# EAGLE board VCO3340 v2 designblock (EAGLE 9.4.2)
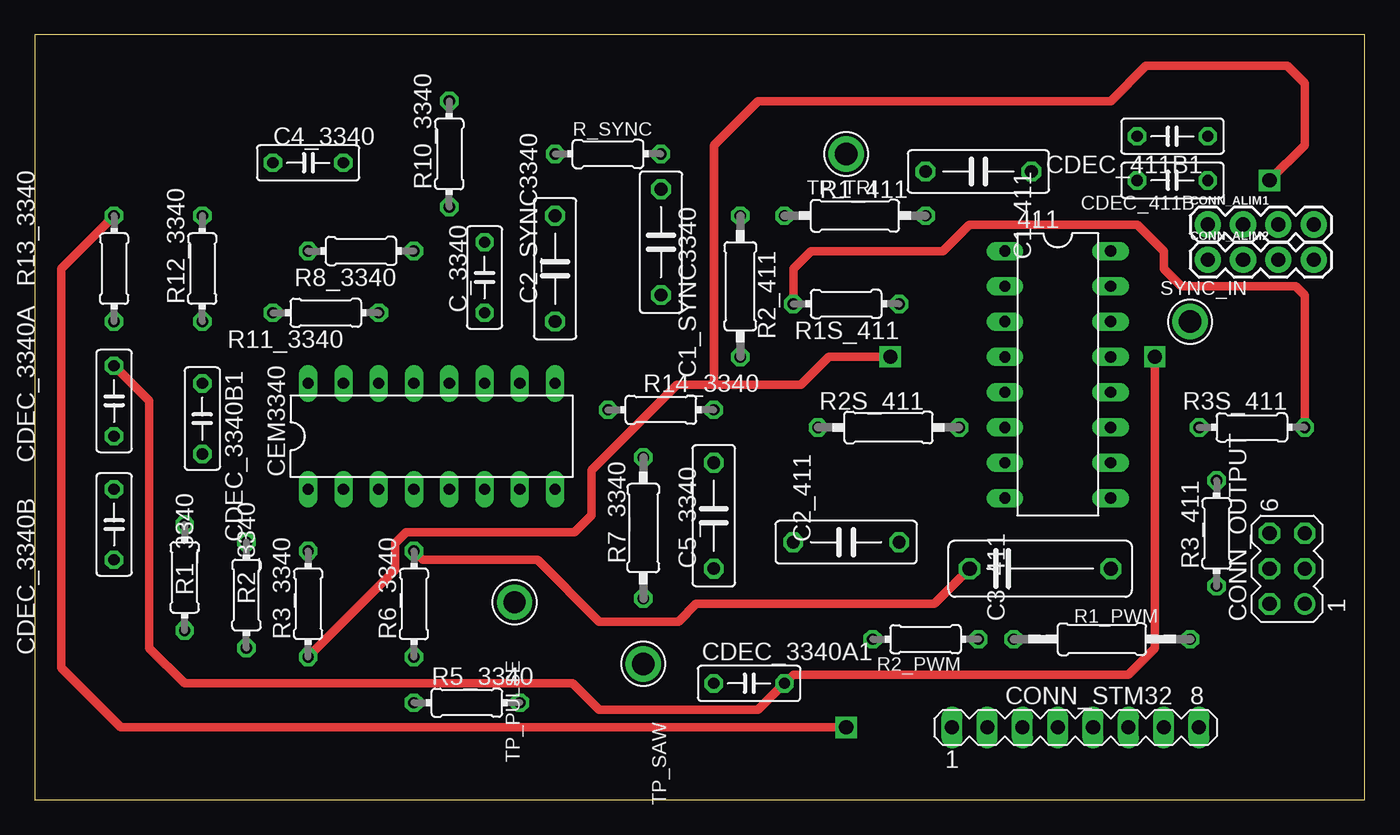
[diagram p0: board, top side]
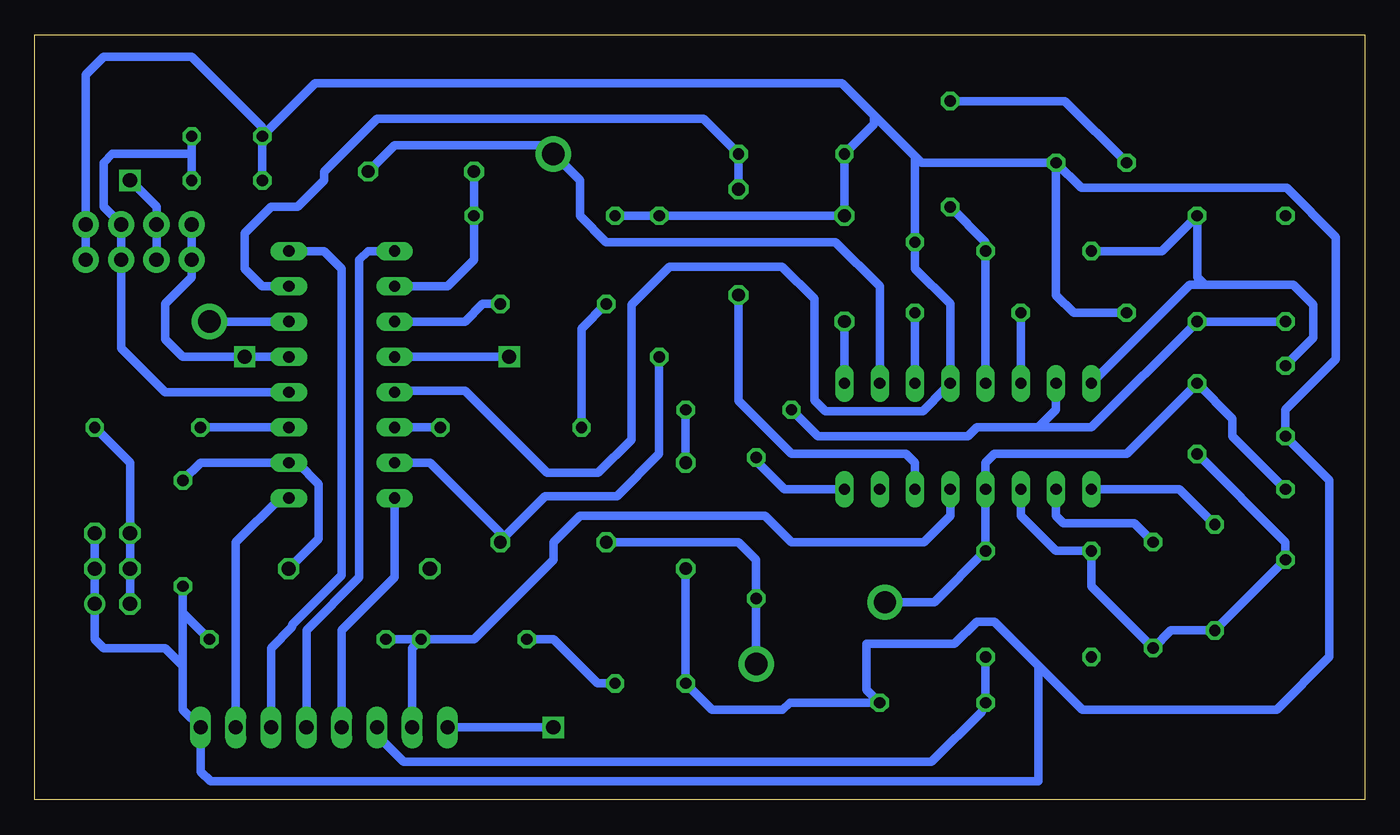
[diagram p1: board, bottom side, seen from below]

Size 95.76 x 55.06 mm. Coordinates in mm from the lower left corner, seen from the top.
Outline: 0,0 95.76,0 95.76,55.06 0,55.06 0,0
Copper layers (1*16): Top 0.035mm / dielectric 1.5mm / Bottom 0.035mm
Design rules "default *": minimum track width 0.4mm, minimum drill 0.35mm, track to track 0.4mm, track to pad 0.4mm, pad to pad 0.4mm, via to via 0.4mm, smd to smd 0.4mm, copper to edge 40mil, drill to drill 6mil, minimum pad ring 10mil, minimum via ring 8mil, stop-mask expansion 4mil, vias tented up to drill 0mil, thermal gap 10mil

## Footprints (pad centres in the part's own frame; a part is rotated, then mirrored left to right if it is on the bottom)
DIL16 = drill 0.813 long: 1 -8.89,-3.81; 2 -6.35,-3.81; 3 -3.81,-3.81; 4 -1.27,-3.81; 5 1.27,-3.81; 6 3.81,-3.81; 7 6.35,-3.81; 8 8.89,-3.81; 9 8.89,3.81; 10 6.35,3.81; 11 3.81,3.81; 12 1.27,3.81; 13 -1.27,3.81; 14 -3.81,3.81; 15 -6.35,3.81; 16 -8.89,3.81
C075-032X103 = drill 0.914 octagon: 1 -3.81,0; 2 3.81,0
C102-043X133 = drill 1.016 octagon: 1 -5.08,0; 2 5.08,0
C050-025X075 = drill 0.813 octagon: 1 -2.54,0; 2 2.54,0
1X04 = drill 1.016 pad 1.88: 1 0,0; 2 2.54,0; 3 5.08,0; 4 7.62,0
MA03-2 = drill 1.016: 1 -2.54,-1.27 | drill 1.016 octagon: 2 -2.54,1.27; 3 0,-1.27; 4 0,1.27; 5 2.54,-1.27; 6 2.54,1.27
MA08-1 = drill 1.016 long: 1 -8.89,0; 2 -6.35,0; 3 -3.81,0; 4 -1.27,0; 5 1.27,0; 6 3.81,0; 7 6.35,0; 8 8.89,0
0207/10 = drill 0.813 octagon: 1 -5.08,0; 2 5.08,0
0204/7 = drill 0.813 octagon: 1 -3.81,0; 2 3.81,0
0207/12 = drill 0.813 octagon: 1 -6.35,0; 2 6.35,0
TESTPOINT_63 = drill 1.6 pad 2.54: P$1 0,0

## Placement (x,y rotation side)
411  ADG411N  [DIL16]  73.66,30.61 270 top
C1_411  470n  [C075-032X103]  67.95,45.21 180 top
C1_SYNC3340  1n  [C075-032X103]  45.09,40.13 270 top
C2_411  470n  [C075-032X103]  58.42,18.54 0 top
C2_SYNC3340  100n  [C075-032X103]  37.46,38.23 270 top
C3_411  470n  [C102-043X133]  72.39,16.64 0 top
C4_3340  10n  [C050-025X075]  19.69,45.85 0 top
C5_3340  10n  [C075-032X103]  48.89,20.45 90 top
C_3340  6.8n  [C050-025X075]  32.38,37.59 270 top
CDEC_411B  100n  [C050-025X075]  81.92,44.58 180 top
CDEC_411B1  10u  [C050-025X075]  81.92,47.75 180 top
CDEC_3340A  100n  [C050-025X075]  5.71,28.7 90 top
CDEC_3340A1  10u  [C050-025X075]  51.43,8.38 0 top
CDEC_3340B  100n  [C050-025X075]  5.71,19.81 270 top
CDEC_3340B1  10u  [C050-025X075]  12.06,27.43 270 top
CEM3340  CEM3340  [DIL16]  28.58,26.16 0 top
CONN_ALIM1  [1X04]  84.45,41.4 0 top
CONN_ALIM2  [1X04]  84.45,38.86 0 top
CONN_OUTPUT  [MA03-2]  90.17,16.64 90 top
CONN_STM32  [MA08-1]  74.93,5.21 0 top
R1_411  100k  [0207/10]  59.05,42.04 0 top
R1_3340  30k  [0204/7]  10.79,16 270 top
R1_PWM  68k  [0207/12]  76.84,11.56 0 top
R1S_411  1k  [0204/7]  58.42,35.69 180 top
R2_411  100k  [0207/10]  50.8,36.96 270 top
R2_3340  5.6k  [0204/7]  15.24,14.73 270 top
R2_PWM  330k  [0204/7]  64.14,11.56 180 top
R2S_411  1k  [0207/10]  61.47,26.8 0 top
R3_411  100k  [0204/7]  85.09,19.18 90 top
R3_3340  820  [0204/7]  19.69,14.1 90 top
R3S_411  1k  [0204/7]  87.63,26.8 180 top
R5_3340  10k  [0204/7]  31.12,6.98 0 top
R6_3340  33k  [0204/7]  27.31,14.1 90 top
R7_3340  5.6k  [0207/10]  43.81,19.56 90 top
R8_3340  1.5M  [0204/7]  23.5,39.5 180 top
R10_3340  470  [0204/7]  29.85,46.48 90 top
R11_3340  1.8k  [0204/7]  20.96,35.05 180 top
R12_3340  220k  [0204/7]  12.06,38.23 90 top
R13_3340  56k  [0204/7]  5.71,38.23 90 top
R14_3340  470  [0204/7]  45.09,28.07 0 top
R_SYNC  470k  [0204/7]  41.27,46.48 0 top
SYNC_IN  [TESTPOINT_63]  83.19,34.42 0 top
TP_PULSE  [TESTPOINT_63]  34.54,14.22 270 top
TP_SAW  [TESTPOINT_63]  43.81,9.78 270 top
TP_TRI  [TESTPOINT_63]  58.42,46.48 180 top

## Library data of the parts
411 = analog-devices; MF: ALTERA CORPORATION; MPN: ADG411BN; OC_FARNELL: 1424317; OC_NEWARK: 05F6198
C1_411 C1_SYNC3340 C2_411 C2_SYNC3340 C3_411 C4_3340 C5_3340 C_3340 CDEC_411B CDEC_411B1 CDEC_3340A CDEC_3340A1 CDEC_3340B CDEC_3340B1 = rcl; SPICEPREFIX: C
CEM3340 = analog-audio-chips
CONN_ALIM1 CONN_ALIM2 = SparkFun-Connectors; PROD_ID: CONN-09696
CONN_OUTPUT CONN_STM32 = con-lstb; OC_FARNELL: unknown; OC_NEWARK: unknown
R1_411 R1_3340 R1_PWM R1S_411 R2_411 R2_3340 R2_PWM R2S_411 R3_411 R3_3340 R3S_411 R5_3340 R6_3340 R7_3340 R8_3340 R10_3340 R11_3340 R12_3340 R13_3340 R14_3340 R_SYNC = rcl; SPICEPREFIX: R
SYNC_IN TP_PULSE TP_SAW TP_TRI = 6P1_EVB

## Nets
5V: 411.12 CDEC_411B1.1 CDEC_411B.1 CONN_ALIM1.3 CONN_ALIM2.3
411_IN_PULSE: 411.8 CONN_STM32.4
411_IN_SAW: 411.9 CONN_STM32.7
411_IN_SYNC: 411.16 CONN_STM32.6
411_IN_TRI: 411.1 CONN_STM32.5
+15V: 411.13 CDEC_3340A1.2 CDEC_3340A.2 CEM3340.16 CONN_ALIM1.1 CONN_ALIM2.1 R2_PWM.2 R8_3340.2 R12_3340.2
-15V: 411.4 CONN_ALIM1.2 CONN_ALIM2.2 R3_3340.1
AGND: 411.5 C2_SYNC3340.1 C4_3340.2 C5_3340.1 C_3340.1 CDEC_411B1.2 CDEC_411B.2 CDEC_3340A1.1 CDEC_3340A.1 CEM3340.12 CONN_ALIM1.4 CONN_ALIM2.4 CONN_OUTPUT.1 CONN_OUTPUT.3 CONN_OUTPUT.5 CONN_STM32.8 R1_411.1 R1_PWM.2 R2_411.1 R3_411.1 R5_3340.2 R11_3340.2 R_SYNC.1
CALIB: CONN_STM32.3 R5_3340.1 R6_3340.1
CV_FREQ: CONN_STM32.1 R13_3340.2
CV_PWM: CEM3340.5 CONN_STM32.2 R1_PWM.1 R2_PWM.1
N$1: C2_SYNC3340.2 CEM3340.9
N$2: 411.6 R2S_411.2
N$16: C1_SYNC3340.2 CEM3340.6
N$20: CEM3340.1 R1_3340.1
N$23: CEM3340.2 R2_3340.1
N$25: CEM3340.13 R8_3340.1 R10_3340.1
N$28: CEM3340.8 R7_3340.2
N$30: CDEC_3340B1.2 CDEC_3340B.2 CEM3340.3 R1_3340.2 R2_3340.2 R3_3340.2
N$40: CEM3340.15 R12_3340.1 R13_3340.1 R14_3340.1
N$42: C5_3340.2 R14_3340.2
N$43: CEM3340.14 R11_3340.1
N$45: C4_3340.1 R10_3340.2
N$46: C_3340.2 CEM3340.11
N$49: 411.2 C1_411.2 R1_411.2
N$50: 411.7 C2_411.2 R2_411.2
N$51: 411.10 C3_411.2 R3_411.2
OUT: CONN_OUTPUT.2 CONN_OUTPUT.4 CONN_OUTPUT.6 R1S_411.2 R2S_411.1 R3S_411.1
PULSE: C3_411.1 CDEC_3340B1.1 CDEC_3340B.1 CEM3340.4 R6_3340.2 TP_PULSE.P$1
PULSE_OUT: 411.11 R3S_411.2
SAW_3340: C2_411.1 R7_3340.1 TP_SAW.P$1
SYNC_3340: 411.15 C1_SYNC3340.1 R_SYNC.2
SYNC_IN: 411.14 SYNC_IN.P$1
TRI_3340: C1_411.1 CEM3340.10 TP_TRI.P$1
TRI_OUT: 411.3 R1S_411.1

## Tracks (layer width: path | path; a pad name or v marks a point on that pad's centre or on a via)
5V
  Bottom 0.61: 411.12 86.36,29.34 89.54,32.51 CONN_ALIM2.3 CONN_ALIM1.3 90.81,42.67 90.81,45.85 90.17,46.48 84.45,46.48 | CDEC_411B1.1 84.45,46.48 | 84.45,46.48 CDEC_411B.1
411_IN_PULSE
  Bottom 0.61: 411.8 69.85,16 73.66,12.19 CONN_STM32.4
411_IN_SAW
  Bottom 0.61: 411.9 78.11,21.72 81.28,18.54 CONN_STM32.7
411_IN_SYNC
  Bottom 0.61: 411.16 74.93,39.5 73.66,38.23 73.66,16.16 77.21,12.61 77.21,12.45 78.74,10.92 CONN_STM32.6
411_IN_TRI
  Bottom 0.61: 411.1 71.76,39.5 72.39,38.86 72.39,16 76.2,12.19 CONN_STM32.5
+15V  (via drill 1.02)
  Top 0.61: v80.65,31.88 80.65,10.92 78.74,9.02 54.61,9.02 CDEC_3340A1.2 52.07,6.48 40.64,6.48 38.73,8.38 10.79,8.38 8.26,10.92 8.26,28.7 CDEC_3340A.2
  Bottom 0.61: CONN_ALIM1.1 CONN_ALIM2.1 84.45,37.59 86.36,35.69 86.36,33.15 85.09,31.88 v80.65,31.88 411.13 | 11.53,37.05 12.06,37.59 R12_3340.2 14.61,39.5 R8_3340.2 | 11.53,37.05 5.15,37.05 3.71,35.62 3.71,33.24 CDEC_3340A.2 | R2_PWM.2 58.42,11.56 55.24,8.38 CDEC_3340A1.2 | CEM3340.16 12.61,37.05 11.53,37.05
-15V  (via drill 1.02)
  Top 0.61: v61.59,31.88 57.18,31.88 55.17,29.88 48.89,29.88 | R3_3340.1 25.94,16.54 25.94,18.47 26.74,19.27 38.88,19.27 40.1,20.49 40.1,23.72 46.26,29.88 48.89,29.88 | 48.89,29.88 48.89,47.12 52.07,50.29 77.47,50.29 80.01,52.83 90.17,52.83 91.44,51.56 91.44,47.12 v88.9,44.58
  Bottom 0.61: CONN_ALIM2.2 CONN_ALIM1.2 87,42.67 v88.9,44.58 | 411.4 v61.59,31.88
AGND
  Bottom 0.61: CONN_ALIM2.4 CONN_ALIM1.4 92.08,52.2 90.81,53.47 84.45,53.47 79.38,48.39 CDEC_411B1.2 | CONN_OUTPUT.5 CONN_OUTPUT.3 CONN_OUTPUT.1 91.44,11.56 90.81,10.92 86.36,10.92 85.09,9.65 | CDEC_411B1.2 CDEC_411B.2 | C5_3340.1 CDEC_3340A1.1 46.99,6.48 41.91,6.48 41.4,6.98 R5_3340.2 35.88,7.94 35.88,11.24 29.53,11.24 27.94,12.83 26.67,12.83 23.5,9.65 | C4_3340.2 31.92,45.85 32.38,46.31 | 32.38,46.31 35.33,49.25 | 35.33,49.25 37.64,51.56 75.57,51.56 CDEC_411B1.2 | 23.5,9.65 23.5,1.32 83.11,1.32 83.82,2.03 CONN_STM32.8 85.09,6.48 85.09,9.65 | C4_3340.2 20.42,44.04 5.63,44.04 2.07,40.48 2.07,31.71 5.71,28.07 CDEC_3340A.1 2.54,22.99 2.54,10.29 6.35,6.48 20.32,6.48 23.5,9.65 | R11_3340.2 20.96,35.05 22.23,36.32 C4_3340.2 | R1_411.1 R2_411.1 C2_SYNC3340.1 R_SYNC.1 35.33,48.62 35.33,49.25 | 32.38,46.31 C_3340.1 32.38,38.23 29.85,35.69 CEM3340.12 31.02,28.8 31.02,28.75 31.82,27.95 38.83,27.95 39.63,28.75 39.63,36.05 41.96,38.37 50.04,38.37 52.8,35.62 52.8,25.91 55.19,23.53 58.86,23.53 64.76,29.43 69.76,29.43 411.5 | R3_411.1 85.09,13.46 | 85.09,13.46 R1_PWM.2 | 85.09,13.46 85.09,9.65
CALIB
  Bottom 0.61: R6_3340.1 R5_3340.1 27.56,6.35 31.19,2.72 69.22,2.72 71.12,4.63 CONN_STM32.3
CV_FREQ  (via drill 1.02)
  Top 0.61: v58.42,5.21 6.19,5.21 1.91,9.49 1.91,38.23 R13_3340.2
  Bottom 0.61: CONN_STM32.1 v58.42,5.21
CV_PWM
  Bottom 0.61: CEM3340.5 29.85,20.45 31.75,18.54 41.27,18.54 43.18,20.45 56.52,20.45 58.42,18.54 58.42,17.27 64.14,11.56 R2_PWM.1 | R1_PWM.1 R2_PWM.1 | R2_PWM.1 68.58,10.92 CONN_STM32.2
N$1
  Bottom 0.61: C2_SYNC3340.2 CEM3340.9
N$2
  Bottom 0.61: 411.6 R2S_411.2
N$16
  Bottom 0.61: C1_SYNC3340.2 45.09,28.7 41.27,24.89 33.02,24.89 32.38,24.26 CEM3340.6
N$20
  Bottom 0.61: CEM3340.1 13.33,22.35 R1_3340.1
N$23
  Bottom 0.61: CEM3340.2 22.23,20.45 21.69,19.91 16.61,19.91 R2_3340.1
N$25
  Bottom 0.61: R10_3340.1 27.31,40.13 R8_3340.1 CEM3340.13
N$28
  Bottom 0.61: R7_3340.2 43.81,24.38 41.78,22.35 CEM3340.8
N$30
  Bottom 0.61: CEM3340.3 24.77,20.45 22.23,17.91 R3_3340.2 19.69,15.37 R2_3340.2 13.97,12.19 R1_3340.2 CDEC_3340B.2 5.71,18.54 CDEC_3340B1.2
N$40
  Bottom 0.61: R13_3340.1 R12_3340.1 19.69,26.8 23.5,26.8 | CEM3340.15 22.23,28.07 23.5,26.8 | 23.5,26.8 27.94,26.8 28.58,26.16 39.37,26.16 R14_3340.1
N$42
  Bottom 0.61: R14_3340.2 C5_3340.2
N$43
  Bottom 0.61: CEM3340.14 R11_3340.1
N$45
  Bottom 0.61: R10_3340.2 21.59,50.29 C4_3340.1
N$46
  Bottom 0.61: CEM3340.11 C_3340.2
N$49
  Bottom 0.61: 411.2 66.04,36.96 64.14,38.86 R1_411.2 C1_411.2
N$50
  Bottom 0.61: 411.7 67.31,24.26 62.23,19.18 C2_411.2 62.23,18.64 59.01,21.86 53.83,21.86 50.8,24.89 R2_411.2
N$51
  Bottom 0.61: C3_411.2 75.31,18.8 75.31,22.73 76.84,24.26 411.10 83.82,24.26 R3_411.2
OUT
  Top 0.61: R1S_411.2 54.61,38.23 55.88,39.5 65.41,39.5 67.31,41.4 79.38,41.4 81.28,39.5 81.28,38.23 82.55,36.96 90.81,36.96 91.44,36.32 91.44,30.61 91.44,29.97 R3S_411.1
  Bottom 0.61: CONN_OUTPUT.2 CONN_OUTPUT.4 CONN_OUTPUT.6 88.9,24.26 R3S_411.1 | R1S_411.2 56.39,33.91 R2S_411.1
PULSE
  Top 0.61: C3_411.1 64.77,14.1 47.62,14.1 46.35,12.83 40.64,12.83 36.2,17.27 27.94,17.27 R6_3340.2
  Bottom 0.61: TP_PULSE.P$1 30.99,14.22 R6_3340.2 CEM3340.4 27.31,24.26 26.67,24.89 17.15,24.89 CDEC_3340B1.1 9.53,27.43 9.53,26.16 CDEC_3340B.1
PULSE_OUT
  Bottom 0.61: 411.11 R3S_411.2
SAW_3340
  Bottom 0.61: TP_SAW.P$1 43.81,14.1 R7_3340.1 43.81,17.27 45.09,18.54 C2_411.1
SYNC_3340
  Bottom 0.61: 411.15 79.38,36.96 80.65,38.23 80.65,40.77 78.74,42.67 76.84,42.67 74.93,44.58 74.93,45.21 71.12,49.02 47.62,49.02 R_SYNC.2 C1_SYNC3340.1
SYNC_IN
  Bottom 0.61: SYNC_IN.P$1 411.14
TRI_3340
  Bottom 0.61: CEM3340.10 34.92,36.96 38.1,40.13 54.61,40.13 56.52,42.04 56.52,44.58 TP_TRI.P$1 58.42,47.12 69.85,47.12 C1_411.1
TRI_OUT
  Bottom 0.61: 411.3 64.77,34.42 63.5,35.69 R1S_411.1